# EAGLE board uRings_v2.0 (EAGLE 9.1.0), part 1 of 2
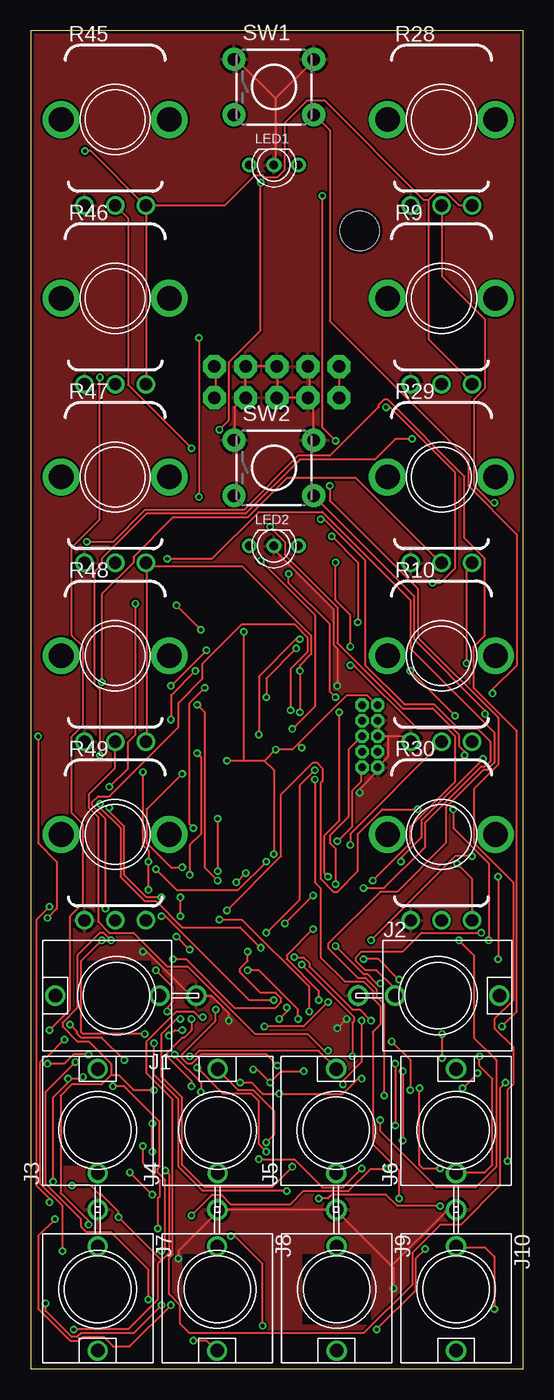
[diagram p0: board, top side]
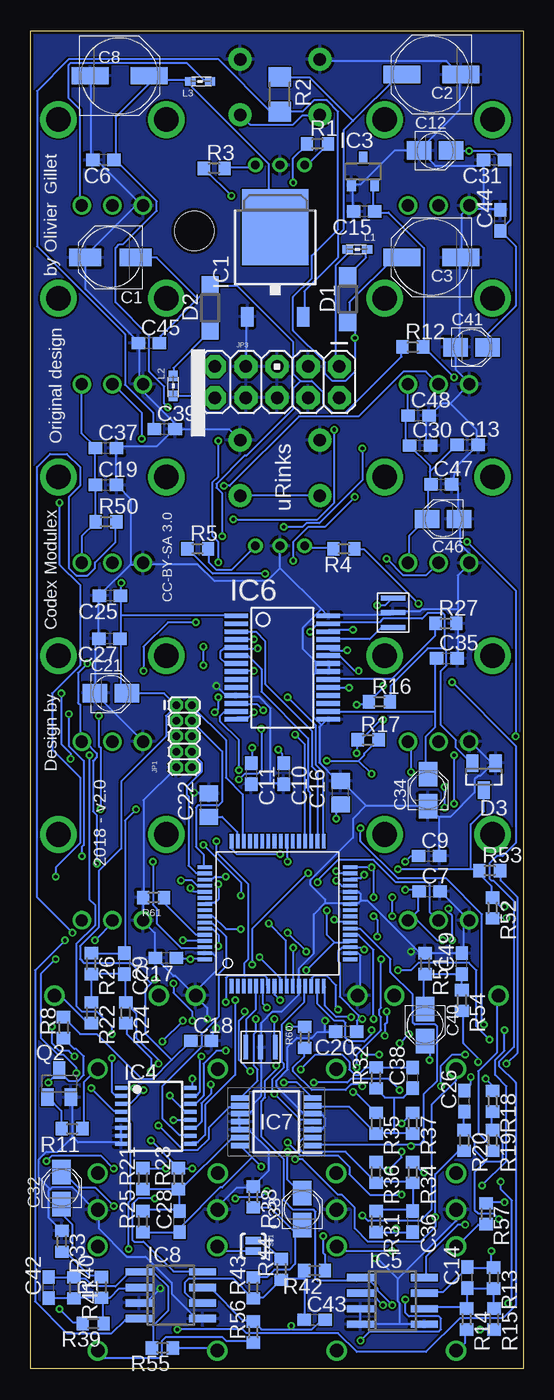
[diagram p1: board, bottom side, seen from below]

Size 40.14 x 109 mm. Coordinates in mm from the lower left corner, seen from the top.
Outline: 0,0 40.14,0 40.14,109 0,109 0,0
Copper layers (1*16): Top 0.035mm / dielectric 1.5mm / Bottom 0.035mm
Design rules "dirt_cheap_dirty_boards.v1.1": minimum track width 6mil, minimum drill 12mil, track to track 6mil, track to pad 6mil, pad to pad 6mil, via to via 6mil, smd to smd 0mil, copper to edge 10mil, drill to drill 10mil, minimum pad ring 10mil, minimum via ring 6mil, stop-mask expansion 2mil, vias tented up to drill 25mil, thermal gap 10mil
Holes 3.2 mm at 26.8,92.7

## Footprints (pad centres in the part's own frame; a part is rotated, then mirrored left to right if it is on the bottom)
PANASONIC_C = smd 2.6 x 1.4: + 2.05,0; - -2.05,0
PANASONIC_D = smd 3 x 1.4: + 2.4,0; - -2.4,0
C0603 = smd 1.1 x 1: 1 -0.85,0; 2 0.85,0
PANASONIC_A = smd 2 x 1.5: + 1.3,0; - -1.3,0
C0805 = smd 1.3 x 1.5: 1 -0.95,0; 2 0.95,0
SOD123 = smd 1.4 x 1.4: A 1.9,0; C -1.9,0
SOT23 = smd 1 x 1.4: 1 -0.95,-1.1; 2 0.95,-1.1; 3 0,1.1
TO252 = smd 1 x 1.6: 1 -2.28,-4.8; 2 2.28,-4.8 | smd 5.4 x 6.2: 3 0,2.5
TQFP-10X10-64 = smd 1.2 x 0.3: 1 -5.936,3.75; 2 -5.936,3.25; 3 -5.936,2.75; 4 -5.936,2.25; 5 -5.936,1.75; 6 -5.936,1.25; 7 -5.936,0.75; 8 -5.936,0.25; 9 -5.936,-0.25; 10 -5.936,-0.75; 11 -5.936,-1.25; 12 -5.936,-1.75; 13 -5.936,-2.25; 14 -5.936,-2.75; 15 -5.936,-3.25; 16 -5.936,-3.75; 33 5.886,-3.75; 34 5.886,-3.25; 35 5.886,-2.75; 36 5.886,-2.25; 37 5.886,-1.75; 38 5.886,-1.25; 39 5.886,-0.75; 40 5.886,-0.25; 41 5.886,0.25; 42 5.886,0.75; 43 5.886,1.25; 44 5.886,1.75; 45 5.886,2.25; 46 5.886,2.75; 47 5.886,3.25; 48 5.886,3.75 | smd 0.3 x 1.2: 17 -3.75,-5.911; 18 -3.25,-5.911; 19 -2.75,-5.911; 20 -2.25,-5.911; 21 -1.75,-5.911; 22 -1.25,-5.911; 23 -0.75,-5.911; 24 -0.25,-5.911; 25 0.25,-5.911; 26 0.75,-5.911; 27 1.25,-5.911; 28 1.75,-5.911; 29 2.25,-5.911; 30 2.75,-5.911; 31 3.25,-5.911; 32 3.75,-5.911; 49 3.75,5.936; 50 3.25,5.936; 51 2.75,5.936; 52 2.25,5.936; 53 1.75,5.936; 54 1.25,5.936; 55 0.75,5.936; 56 0.25,5.936; 57 -0.25,5.936; 58 -0.75,5.936; 59 -1.25,5.936; 60 -1.75,5.936; 61 -2.25,5.936; 62 -2.75,5.936; 63 -3.25,5.936; 64 -3.75,5.936
DBZ_R-PDSO-G3 = smd 0.7 x 1: 1 -0.95,-1.1; 2 0.95,-1.1; 3 0,1.1
TSSOP16 = smd 0.35 x 1: 1 -1.95,-2.825; 2 -1.3,-2.825; 3 -0.65,-2.825; 4 0,-2.825; 5 0.65,-2.825; 6 1.3,-2.825; 7 1.95,-2.825; 8 2.6,-2.825; 9 2.6,2.825; 10 1.95,2.825; 11 1.3,2.825; 12 0.65,2.825; 13 0,2.825; 14 -0.65,2.825; 15 -1.3,2.825; 16 -1.95,2.825
SO08 = smd 0.6 x 2.2: 1 -1.905,-2.6; 2 -0.635,-2.6; 3 0.635,-2.6; 4 1.905,-2.6; 5 1.905,2.6; 6 0.635,2.6; 7 -0.635,2.6; 8 -1.905,2.6
SSOP28 = smd 0.381 x 1.905: 1 -4.55,-3.752; 2 -3.9,-3.752; 3 -3.25,-3.752; 4 -2.6,-3.752; 5 -1.95,-3.752; 6 -1.3,-3.752; 7 -0.65,-3.752; 8 0,-3.752; 9 0.65,-3.752; 10 1.3,-3.752; 11 1.95,-3.752; 12 2.6,-3.752; 13 3.25,-3.752; 14 3.9,-3.752; 15 3.9,3.752; 16 3.25,3.752; 17 2.6,3.752; 18 1.95,3.752; 19 1.3,3.752; 20 0.65,3.752; 21 0,3.752; 22 -0.65,3.752; 23 -1.3,3.752; 24 -1.95,3.752; 25 -2.6,3.752; 26 -3.25,3.752; 27 -3.9,3.752; 28 -4.55,3.752
SOP65P640X120-14N = smd 1.475 x 0.45: 1 -2.938,1.95; 2 -2.938,1.3; 3 -2.938,0.65; 4 -2.938,0; 5 -2.938,-0.65; 6 -2.938,-1.3; 7 -2.938,-1.95; 8 2.938,-1.95; 9 2.938,-1.3; 10 2.938,-0.65; 11 2.938,0; 12 2.938,0.65; 13 2.938,1.3; 14 2.938,1.95
WQP-PJ301M-12_JACK = drill 1.1: P$1 0,5; P$2 0,-3.5; P$3 0,-6.5
2X5-1.27 = drill 0.61 pad 1.067 octagon: 1 -1.27,3.81; 2 0,3.81; 3 -1.27,2.54; 4 0,2.54; 5 -1.27,1.27; 6 0,1.27; 7 -1.27,0; 8 0,0; 9 -1.27,-1.27; 10 0,-1.27
AVR_ICSP = drill 1.016 pad 1.88 octagon: 1 -1.27,5.08; 2 1.27,5.08; 3 -1.27,2.54; 4 1.27,2.54; 5 -1.27,0; 6 1.27,0; 7 -1.27,-2.54; 8 1.27,-2.54; 9 -1.27,-5.08; 10 1.27,-5.08
0603 = smd 0.85 x 0.7: 1 -0.9,0; 2 0.7,0
LED-BICOLOR-THROUGHHOLE = drill 0.7: 1 -2,0; 2 0,0; 3 2,0
INSTRUO_CRYSTAL_SMALLER = smd 0.4 x 2: GND 0,0; X1 -1.2,0; X2 1.2,0
SOT23-BEC = smd 1 x 1.4: B -0.95,-1.1; C 0,1.1; E 0.95,-1.1
R0603 = smd 1 x 1.1: 1 -0.85,0; 2 0.85,0
R1206 = smd 1.6 x 1.803: 1 -1.422,0; 2 1.422,0
INSTRUO_Q-POT2 = drill 1 pad 1.5: P$1 -2.5,-7; P$2 0,-7; P$3 2.5,-7 | drill 2 pad 2.5: P$4 -4.4,0; P$5 4.4,0
SJ_2S-NOTRACE = smd 0.635 x 1.27: 1 -0.45,0; 2 0.4,0
TACTILE-PTH = drill 1.016 pad 1.88: 1 -3.251,2.261; 2 3.251,2.261; 3 -3.251,-2.261; 4 3.251,-2.261

## Placement (x,y rotation side)
C1  22u  [PANASONIC_C]  33.64,90.53 180 bottom
C2  47u  [PANASONIC_D]  7.48,105.43 180 bottom
C3  47u  [PANASONIC_D]  7.49,90.53 180 bottom
C6  100n  [C0603]  34.22,98.47 180 bottom
C7  1u  [C0603]  7.64,38.89 0 bottom
C8  47u  [PANASONIC_D]  32.9,105.33 0 bottom
C9  100n  [C0603]  7.67,41.77 0 bottom
C10  100n  [C0603]  19.52,48.47 270 bottom
C11  100n  [C0603]  22.17,48.47 270 bottom
C12  10u  [PANASONIC_A]  7.18,99.23 0 bottom
C13  100n  [C0603]  4.52,75.27 0 bottom
C14  2.2n  [C0603]  4.56,7.43 90 bottom
C15  100n  [C0603]  12.97,94.27 180 bottom
C16  2.2u  [C0805]  14.89,46.92 90 bottom
C17  100n  [C0603]  29.12,33.47 180 bottom
C18  1u  [C0603]  26.25,26.71 0 bottom
C19  100n  [C0603]  34,72 0 bottom
C20  100n  [C0603]  14.42,27.47 180 bottom
C21  10u  [PANASONIC_A]  33.6,55.03 0 bottom
C22  2.2u  [C0805]  25.61,45.92 90 bottom
C25  100n  [C0603]  33.67,62.97 180 bottom
C26  10n  [C0603]  4.8,21.8 90 bottom
C27  100n  [C0603]  33.72,59.47 180 bottom
C28  10n  [C0603]  28,12 90 bottom
C29  2.2n  [C0603]  32.5,33 270 bottom
C30  1u  [C0603]  8.41,75.21 0 bottom
C31  100n  [C0603]  2.37,98.47 180 bottom
C32  10u  [PANASONIC_A]  37.62,14.73 90 bottom
C33  10u  [PANASONIC_A]  18,13 90 bottom
C34  10u  [PANASONIC_A]  7.76,47.12 90 bottom
C35  100n  [C0603]  6.22,57.87 0 bottom
C36  10n  [C0603]  9,12 270 bottom
C37  100n  [C0603]  34,75 0 bottom
C38  10n  [C0603]  9,23.7 90 bottom
C39  100n  [C0603]  29.22,76.55 0 bottom
C40  10u  [PANASONIC_A]  8,28 270 bottom
C41  10u  [PANASONIC_A]  4.2,83.22 0 bottom
C42  18p  [C0603]  38.67,6.61 90 bottom
C43  18p  [C0603]  17,4 0 bottom
C44  100n  [C0603]  1.87,93.55 90 bottom
C45  100n  [C0603]  30.52,83.55 0 bottom
C46  10u  [PANASONIC_A]  6.52,69.22 180 bottom
C47  100n  [C0603]  6.67,72.05 0 bottom
C48  100n  [C0603]  8.52,77.65 0 bottom
C49  220p  [C0603]  5,33 90 bottom
D1  1N5819HW  [SOD123]  14.31,87.12 90 bottom
D2  1N5819HW  [SOD123]  25.51,86.42 90 bottom
D3  BAT54S  [SOT23]  3.2,48.23 180 bottom
IC1  LM1117-3.3  [TO252]  20.2,90.5 0 bottom
IC2  STM32F405RGT6  [TQFP-10X10-64]  20.02,37.1 90 bottom
IC3  LM4040B10  [DBZ_R-PDSO-G3]  13.05,97.53 0 bottom
IC4  4051PW  [TSSOP16]  29.95,20.93 270 bottom
IC5  MCP6002  [SO08]  10.66,5.53 270 bottom
IC6  WM8731  [SSOP28]  19.63,56.8 270 bottom
IC7  MCP6004-I_ST  [SOP65P640X120-14N]  20.12,20.12 180 bottom
IC8  TL072  [SO08]  28.72,6 270 bottom
J1  WQP-PJ301M-12_JACK  [WQP-PJ301M-12_JACK]  7,30.4 90 top
J2  WQP-PJ301M-12_JACK  [WQP-PJ301M-12_JACK]  33.2,30.4 270 top
J3  WQP-PJ301M-12_JACK  [WQP-PJ301M-12_JACK]  5.46,19.43 0 top
J4  WQP-PJ301M-12_JACK  [WQP-PJ301M-12_JACK]  15.24,19.43 0 top
J5  WQP-PJ301M-12_JACK  [WQP-PJ301M-12_JACK]  24.89,19.43 0 top
J6  WQP-PJ301M-12_JACK  [WQP-PJ301M-12_JACK]  34.67,19.43 0 top
J7  WQP-PJ301M-12_JACK  [WQP-PJ301M-12_JACK]  5.46,6.48 180 top
J8  WQP-PJ301M-12_JACK  [WQP-PJ301M-12_JACK]  15.2,6.48 180 top
J9  WQP-PJ301M-12_JACK  [WQP-PJ301M-12_JACK]  24.93,6.48 180 top
J10  WQP-PJ301M-12_JACK  [WQP-PJ301M-12_JACK]  34.67,6.48 180 top
JP1  M05X2MINIJTAG  [2X5-1.27]  27.01,50.26 0 bottom
JP3  M05X2PTH  [AVR_ICSP]  20.06,80.37 270 bottom
L1  [0603]  13.61,91.19 180 bottom
L2  [0603]  28.53,79.97 270 bottom
L3  [0603]  26.22,104.87 0 bottom
LED1  WP115VEGW  [LED-BICOLOR-THROUGHHOLE]  19.82,98.06 180 top
LED2  WP115VEGW  [LED-BICOLOR-THROUGHHOLE]  19.82,67.04 180 top
Q1  8MHz  [INSTRUO_CRYSTAL_SMALLER]  21.41,26.2 180 bottom
Q2  MMBT3904  [SOT23-BEC]  37.82,23.23 0 bottom
Q3  12.288MHz  [INSTRUO_CRYSTAL_SMALLER]  10.6,61.6 90 bottom
R1  180  [R0603]  16.77,99.79 0 bottom
R2  4.7  [R1206]  19.84,103.82 270 bottom
R3  180  [R0603]  25.19,97.79 0 bottom
R4  180  [R0603]  14.61,66.79 180 bottom
R5  180  [R0603]  26.53,66.79 0 bottom
R8  10k  [R0603]  37.45,27.79 90 bottom
R9  10kB  [INSTRUO_Q-POT2]  33.48,87.2 0 top
R10  10kB  [INSTRUO_Q-POT2]  33.48,58.09 0 top
R11  100k  [R0603]  36.77,19.55 180 bottom
R12  2.2k  [R0603]  9,83.23 0 bottom
R13  47k  [R0603]  2.4,7.4 270 bottom
R14  100k  [R0603]  4.62,4.05 270 bottom
R15  180k  [R0603]  2.37,4.05 270 bottom
R16  2.2k  [R0603]  11.72,54.33 0 bottom
R17  2.2k  [R0603]  12.64,51.23 0 bottom
R18  20k  [R0603]  2.5,21.8 270 bottom
R19  100k  [R0603]  2.5,18.6 270 bottom
R20  120k  [R0603]  4.8,18.6 270 bottom
R21  100k  [R0603]  31,15.5 90 bottom
R22  100k  [R0603]  35.2,29 270 bottom
R23  120k  [R0603]  28.1,15.5 90 bottom
R24  120k  [R0603]  32.4,29 270 bottom
R25  20k  [R0603]  31,12 90 bottom
R26  20k  [R0603]  35.2,33 270 bottom
R27  36k  [R0603]  6.29,60.71 0 bottom
R28  10kB  [INSTRUO_Q-POT2]  33.48,101.76 0 top
R29  10kB  [INSTRUO_Q-POT2]  33.48,72.64 0 top
R30  10kB  [INSTRUO_Q-POT2]  33.48,43.53 0 top
R31  20k  [R0603]  12,12 270 bottom
R32  20k  [R0603]  12,23.7 90 bottom
R33  47k  [R0603]  37.61,10.39 270 bottom
R34  100k  [R0603]  9,16 270 bottom
R35  100k  [R0603]  12,20 270 bottom
R36  120k  [R0603]  12,16 270 bottom
R37  120k  [R0603]  9,20 270 bottom
R38  47k  [R0603]  22,14 270 bottom
R39  47k  [R0603]  35.05,3.69 180 bottom
R40  6.8k  [R0603]  34.36,6.63 90 bottom
R41  47k  [R0603]  36.6,6.6 270 bottom
R42  47k  [R0603]  17,8 180 bottom
R43  6.8k  [R0603]  22,6.6 90 bottom
R44  47k  [R0603]  19.7,8.1 90 bottom
R45  10kB  [INSTRUO_Q-POT2]  6.89,101.76 0 top
R46  10kB  [INSTRUO_Q-POT2]  6.89,87.2 0 top
R47  10kB  [INSTRUO_Q-POT2]  6.89,72.64 0 top
R48  10kB  [INSTRUO_Q-POT2]  6.89,58.09 0 top
R49  10kB  [INSTRUO_Q-POT2]  6.89,43.53 0 top
R50  3.3M  [R0603]  34,69 0 bottom
R51  6.8k  [R0603]  8,33 270 bottom
R52  100k  [R0603]  2.49,37.53 270 bottom
R53  1M  [R0603]  2.73,40.59 0 bottom
R54  36k  [R0603]  5,30 270 bottom
R55  1.0k  [R0603]  29.41,1.71 180 bottom
R56  1.0k  [R0603]  22,3 90 bottom
R57  470k  [R0603]  3.04,12.63 270 bottom
R60  10k  [R0603]  17.8,27 270 bottom
R61  10k  [R0603]  30.12,38.39 0 bottom
SJ1  SOLDERJUMPERNC2  [SJ_2S-NOTRACE]  22,10 270 bottom
SW1  [TACTILE-PTH]  19.82,104.41 0 top
SW2  [TACTILE-PTH]  19.82,73.39 0 top

## Library data of the parts
C1-C3 C6-C22 C25-C27 C30-C35 C37 C39-C49 R1-R5 R8 R11-R20 R27 R33 R38-R44 R51-R57 R60 R61 = rcl
C28 C29 C36 C38 R21-R26 R31 R32 R34-R37 R50 = resistor
D1-D3 = diode
IC1 = og-vreg
IC2 = og-stm32f2
IC3 = texas
IC4 = og-ics
IC5 = gm-ics
IC6 = og-dac
IC7 = SamacSys_Parts; DESCRIPTION: Quad 1.8V 1MHz OpAmp,MCP6004-I/ST; HEIGHT: 1.2mm; MANUFACTURER_NAME: Microchip; MANUFACTURER_PART_NUMBER: MCP6004-I/ST; MOUSER_PART_NUMBER: 579-MCP6004-I/ST
IC8 = og-linear
J1-J10 = thonkiconn
JP1 JP3 = og-header
L1-L3 = wuerth-elektronik
LED1 LED2 = og-leds
Q1 Q3 R9 R10 R28-R30 R45-R49 = uClouds_002_
Q2 = transistor
SJ1 SW1 SW2 = SparkFun

## Nets
+3V3: C6.1 C8.+ C10.1 C11.1 C17.1 C18.1 C20.1 C21.+ C25.1 C27.1 D3.2 IC1.3 IC2.19 IC2.32 IC2.48 IC2.64 IC6.1 IC6.27 JP1.1 L3.1 R8.2 R16.2 R17.2 R60.2
+3V3_A: C7.1 C9.1 C12.+ C13.1 C19.1 C30.1 C31.1 C37.1 C41.+ C44.1 C46.+ C47.1 C48.1 IC2.13 IC4.16 IC5.8 IC6.8 IC6.14 IC7.4 L3.2 R9.P$3 R10.P$3 R28.P$3 R29.P$3 R30.P$3 R45.P$3 R46.P$3 R47.P$3 R48.P$3 R49.P$3 R50.1
AREF_-10: C15.1 IC3.2 R12.2 R15.2 R20.2 R23.2 R24.2 R36.1 R37.1
AUX_OUT: C33.+ IC6.13
BOOT_FLASH: IC2.60 R61.2
BRIGHTNESS_ATT: IC4.2 R45.P$2
BRIGHTNESS_CV: C26.2 IC2.14 IC5.1 R18.1
BRIGHTNESS_POT: IC4.4 R28.P$2
CV_NORMALIZATION: J7.P$2 R57.2
DAMP_ATT: IC4.13 R47.P$2
DAMP_CV: C28.1 IC2.21 IC7.14 R25.1
DAMP_POT: IC4.5 R29.P$2
FM_CV: C29.1 IC2.20 IC7.8 R26.1
FREQUENCY_ATT: IC4.1 R46.P$2
FREQUENCY_POT: IC2.11 R9.P$2
GEOMETRY_ATT: IC4.14 R48.P$2
GEOMETRY_CV: C36.2 IC2.22 IC7.1 R31.2
GEOMETRY_POT: IC2.10 R10.P$2
GND: C1.+ C2.- C3.- C6.2 C7.2 C8.- C9.2 C10.2 C11.2 C12.- C13.2 C15.2 C16.2 C17.2 C18.2 C19.2 C20.2 C21.- C22.2 C25.2 C27.2 C30.2 C31.2 C34.- C35.2 C37.2 C39.2 C41.- C44.2 C45.1 C46.- C47.2 C48.2 C49.2 D3.1 IC1.1 IC2.12 IC2.18 IC2.26 IC2.28 IC2.63 IC3.1 IC4.6 IC4.7 IC4.8 IC5.3 IC5.4 IC5.5 IC6.11 IC6.15 IC6.21 IC6.22 IC6.28 IC7.3 IC7.5 IC7.10 IC7.11 IC7.12 IC8.3 IC8.5 J1.P$3 J2.P$3 J3.P$3 J4.P$3 J5.P$3 J6.P$3 J7.P$3 J8.P$3 J9.P$3 J10.P$3 JP1.3 JP1.5 JP1.9 JP3.3 JP3.4 JP3.5 JP3.6 JP3.7 JP3.8 LED1.2 LED2.2 Q1.GND Q2.E Q3.GND R9.P$1 R10.P$1 R27.2 R28.P$1 R29.P$1 R30.P$1 R33.1 R38.1 R45.P$1 R46.P$1 R47.P$1 R48.P$1 R49.P$1 R51.1 R61.1 SW1.1 SW1.2 SW2.1 SW2.2
I2C_SCL: IC2.29 IC6.24 R16.1
I2C_SDA: IC2.30 IC6.23 R17.1
I2S_LRCK: IC2.33 IC6.5 IC6.7
I2S_SCK: IC2.34 IC6.3
I2S_SIN: IC2.35 IC6.6
I2S_SOUT: IC2.36 IC6.4
IN_1: IC6.20 R27.1
IN_2: C40.+ IC6.19
JTCK: IC2.49 JP1.4
JTDI: IC2.50 JP1.8
JTDO: IC2.55 JP1.6
JTMS: IC2.46 JP1.2
MAIN_OUT: C32.+ IC6.12
MUX_ADDR_0: IC2.59 IC4.11
MUX_ADDR_1: IC2.58 IC4.10
MUX_ADDR_2: IC2.57 IC4.9
MUXED_POTS: IC2.9 IC4.3
N$1: J1.P$1 R19.2
N$2: C26.1 IC5.2 R18.2 R19.1 R20.1
N$3: J7.P$1 R14.2
N$6: J3.P$1 R21.2
N$7: IC2.6 Q1.X1
N$8: IC2.5 Q1.X2
N$9: J6.P$1 R11.1
N$10: J2.P$1 R22.2
N$11: C29.2 IC7.9 R22.1 R24.1 R26.2
N$12: LED1.3 R1.2
N$13: C22.1 IC2.47
N$14: C14.1 IC5.6 R13.2 R14.1 R15.1
N$15: C28.2 IC7.13 R21.1 R23.1 R25.2
N$16: C2.+ IC1.2 R2.1
N$17: C34.+ C35.1 IC6.16
N$18: C40.- C49.1 R51.2 R54.1
N$19: C16.1 IC2.31
N$20: J6.P$2 R52.2
N$21: J8.P$1 R54.2
N$22: LED1.1 R3.2
N$23: C33.- R38.2 R43.2
N$24: D1.A L1.1
N$25: C43.1 IC8.6 R42.2 R43.1 R44.1
N$26: J4.P$1 R34.1
N$27: LED2.3 R4.2
N$28: C43.2 IC8.7 R42.1 R56.2
N$29: J10.P$1 R56.1
N$30: C36.1 IC7.2 R31.1 R34.2 R36.2
N$31: C32.- R33.2 R40.2
N$32: C42.1 IC8.2 R39.1 R40.1 R41.2
N$33: C42.2 IC8.1 R41.1 R55.2
N$34: J9.P$1 R55.1
N$35: LED2.1 R5.2
N$36: D2.C L2.1
N$37: IC2.52 R3.1
N$39: J8.P$2 R53.2
N$40: IC2.8 R4.1
N$41: IC6.25 Q3.X1
N$42: IC6.26 Q3.X2
N$43: IC2.53 R1.1
N$44: IC2.51 R5.1
N$45: J10.P$2 R39.2
N$46: R44.2 SJ1.1
N$47: J9.P$2 SJ1.2
N$48: J5.P$1 R35.1
N$49: C38.1 IC7.6 R32.1 R35.2 R37.2
N$53: J2.P$2 R50.2
N$56: JP3.1 JP3.2 L1.2
N$64: JP3.9 JP3.10 L2.2
N$66: Q2.B R11.2
NORMALIZATION_PROBE: D3.3 IC2.39 R52.1 R53.1 R57.1
POSITION_ATT: IC4.15 R49.P$2
POSITION_CV: C38.2 IC2.23 IC7.7 R32.2
POSITION_POT: IC4.12 R30.P$2
RESET: IC2.7 JP1.10 R60.1
RX: IC2.43
STRUM: IC2.16 Q2.C R8.1
SW_MODE: IC2.61 SW2.3 SW2.4
SW_POLYPHONY: IC2.62 SW1.3 SW1.4
TX: IC2.42
V_OCT_CV: C14.2 IC2.15 IC5.7 R13.1
VBAT: IC2.1
VCC: C3.+ C39.1 D1.C IC8.8 R2.2
VEE: C1.- C45.2 D2.A IC8.4 R12.1